# Altium PCB PCB1.PcbDoc
Units mm, origin at the board's own origin, x right, y up, seen from the top; angles counter-clockwise.
Board outline 152.4 x 101.6 mm, 2 copper layers (Top Layer, Bottom Layer); 11 components, 9 nets, 47 pads, 0 vias.
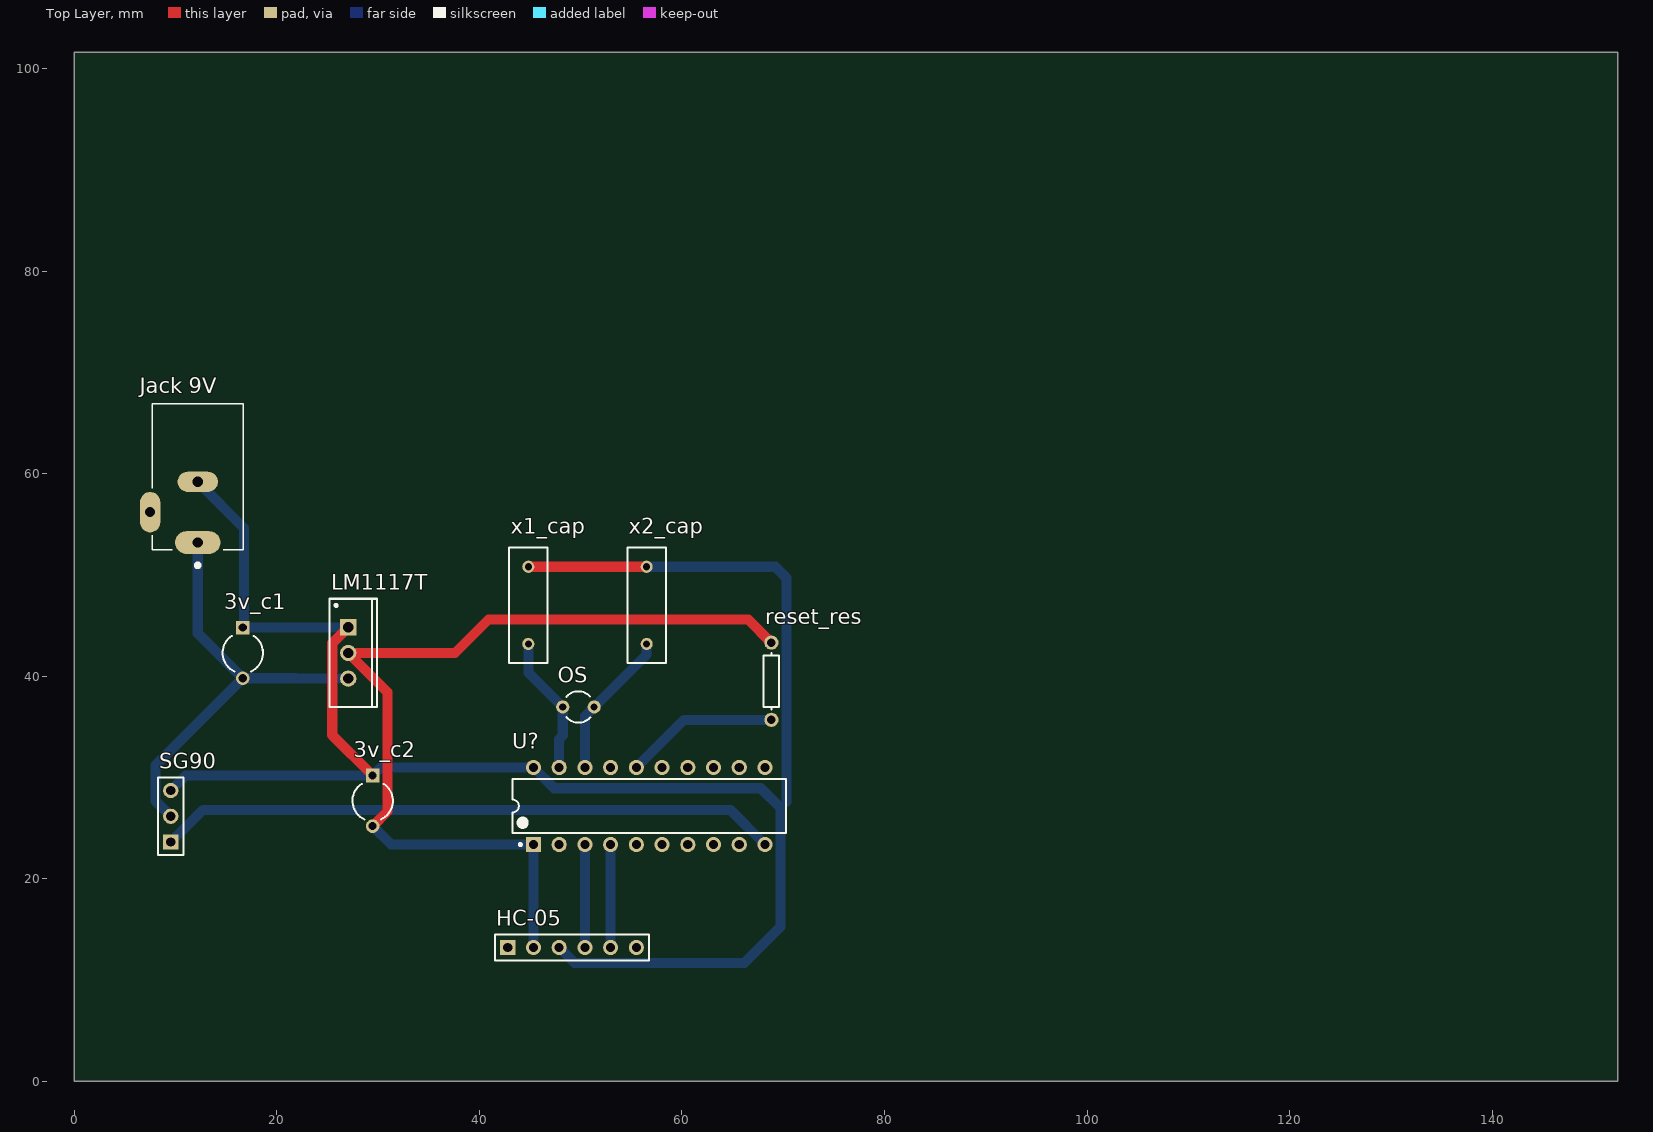
[diagram p0: Top Layer view]
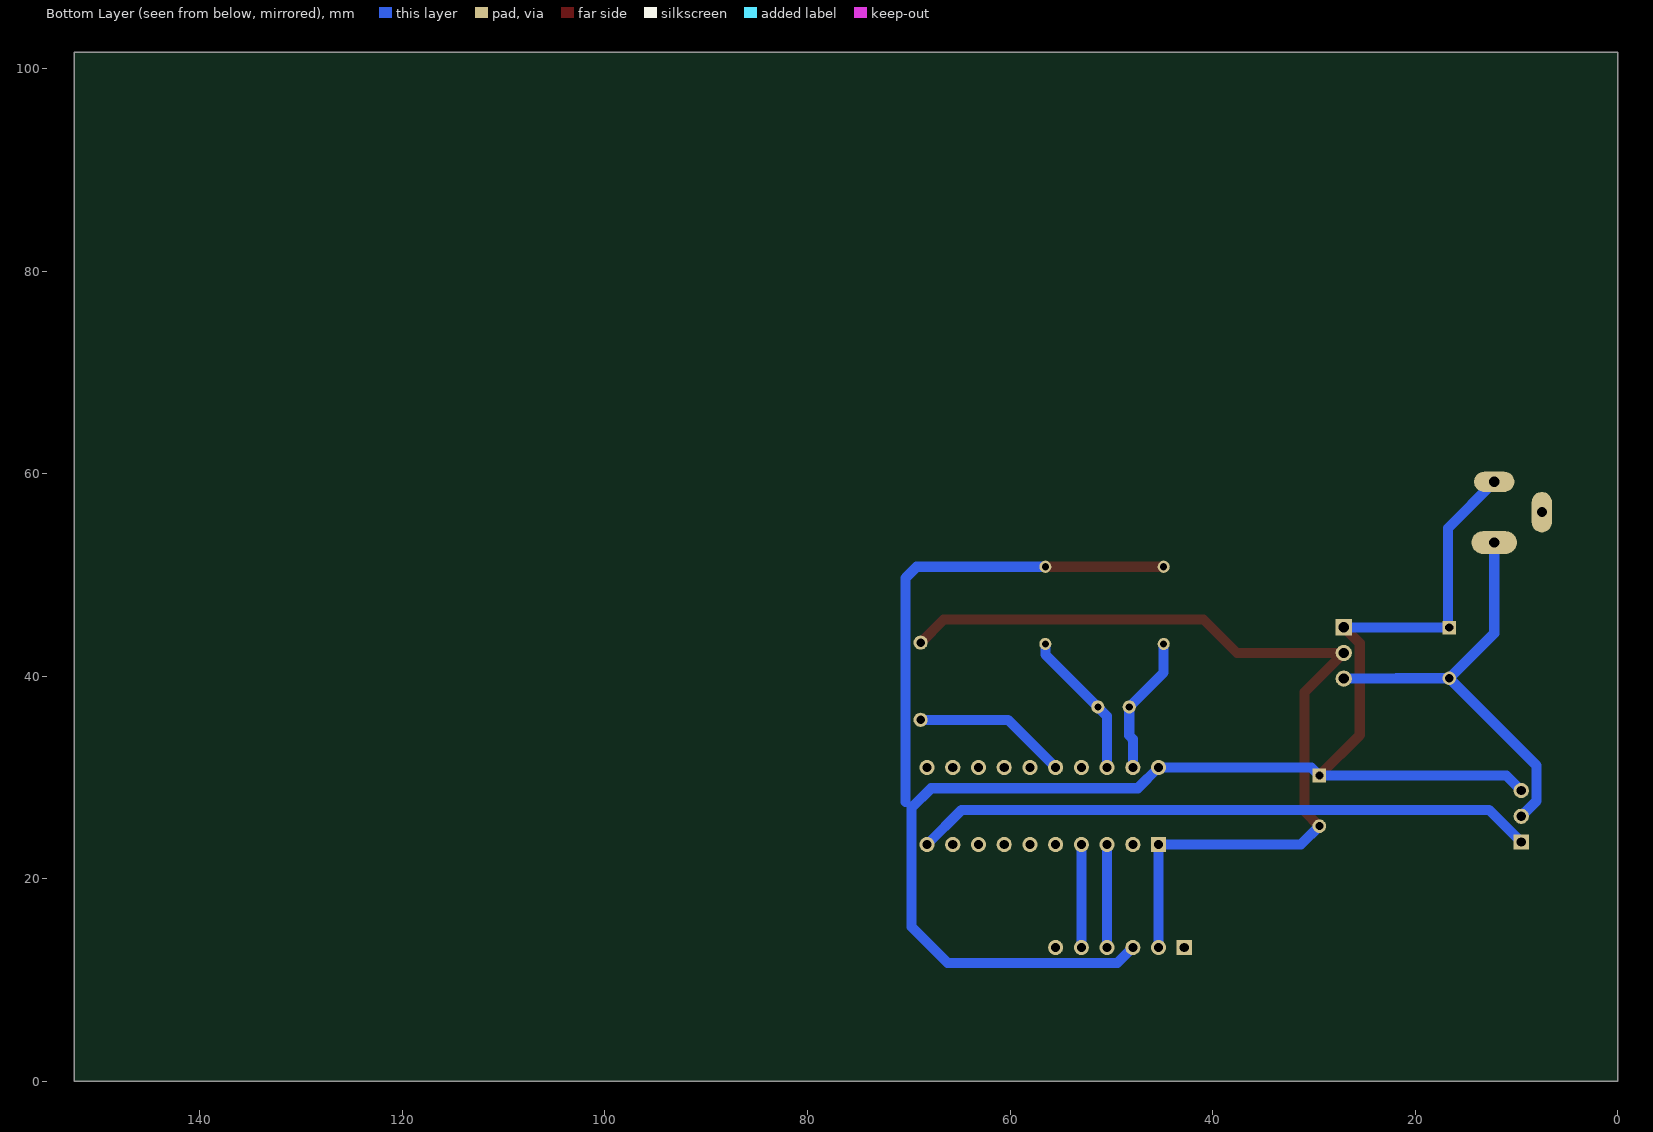
[diagram p1: Bottom Layer view, seen from below]

## Layer stack, top to bottom
Top Solder: solder mask 0.0102, Solder Resist, Dk 3.5
Top Layer: signal copper 0.0356
Dielectric 1: dielectric 0.32, FR-4, Dk 4.8
Bottom Layer: signal copper 0.0356
Bottom Solder: solder mask 0.0102, Solder Resist, Dk 3.5

## Board outline
0,0 152.4,0 152.4,101.6 0,101.6

## Design rules (kind name [scope] priority, off if disabled: settings)
Clearance [All] p1: gap=0.254
PolygonConnect [All] p1: connectstyle=Relief reliefconductorwidth=0.254 reliefentries=4 polygonreliefangle="90 Angle" airgapwidth=0.254
RoomDefinition Sheet1 [InComponentClass('Sheet1')] p1: confinementstyle=ConfineIn formatcopy=TRUE lockcomponents=FALSE outline 0,0 77.47,0 77.47,68.961 0,68.961
RoutingVias [All] p1: holewidth=0.711 width=1.27 viastyle="Through Hole" minholewidth=0.711 minwidth=1.27 maxholewidth=0.711 maxwidth=1.27
SolderMaskExpansion [All] p1: expansion=0.102
Width [All] p1: maxlimit=1 minlimit=1 preferedwidth=1 minimp=50.000000 maximp=50.000000 favimp=50.000000
30 further rules are at their usual default settings.

## Components (designator, comment, footprint, x,y, rotation, side; value= is the part's Value field where it differs from the comment)
3v_c1 "Cap2" CAPR5-4X5 16.637,42.291 r270 top
3v_c2 "Cap2" CAPR5-4X5 29.464,27.686 r270 top
HC-05 "Bluetooth Module" HDR1X6 42.799,13.208 r0 top
"Jack 9V" "PJ-002BH" CUI_PJ-002BH 12.192,59.69 r90 top
LM1117T "LM1117T-3.3" T03B 27.051,42.291 r270 top
OS "XTAL" R38 49.784,36.957 r270 top
reset_res "Res1" AXIAL-0.3 68.834,39.497 r270 top
SG90 "Servo" HDR1X3 9.525,23.622 r90 top
U? "MSP430G2533IN20" TI-N20 56.769,27.178 r90 top
x1_cap "x1_Cap" RAD-0.3 44.831,46.99 r90 top
x2_cap "x2_Cap" RAD-0.3 56.515,46.99 r90 top

## Footprints (in the part's own frame and the unit in brackets; to place one, negate y for a bottom-side part, rotate by r counter-clockwise, add the part's x,y. Pads: shape width x height; smd on the part's side, far side on the other; paste and mask are expansions set on the pad)
AXIAL-0.3 [mm] "Axial Device, Thru-Hole; 2 Leads; 0.3 in Pin Spacing"
  round 1.4 hole 0.85: 1(-3.81,0) 2(3.81,0)
  silkscreen extent -2.77,-0.76 2.77,0.76
CAPR5-4X5 [mm] "Capacitor; 2 Leads"
  rect 1.35x1.35 hole 0.8: 1(-2.5,0)
  round 1.35 hole 0.8: 2(2.5,0)
  silkscreen extent -1.69,-2 1.82,2
CUI_PJ-002BH [mm]
  oval 2.25x4.5 hole 1: 1(-6.5,0)
  oval 2x4 hole 1: 2(-0.5,0)
  oval 4x2 hole 1: 3(-3.5,4.7)
  silkscreen extent -8.94,-4.5 7.2,4.5
HDR1X3 [mm] "Connector; Header; 3 Position"
  rect 1.5x1.5 hole 0.9: 1(0,0)
  round 1.5 hole 0.9: 2(2.54,0) 3(5.08,0)
  silkscreen extent -1.27,-1.27 6.35,1.27
HDR1X6 [mm] "Connector; Header; 6 Position"
  rect 1.5x1.5 hole 0.9: 1(0,0)
  round 1.5 hole 0.9: 2(2.54,0) 3(5.08,0) 4(7.62,0) 5(10.16,0) 6(12.7,0)
  silkscreen extent -1.27,-1.27 13.97,1.27
R38 [mm] "Crystal, Thru-Hole; 2 Leads; Body 3.1 x 8.2 mm (Dia.xH)"
  round 1.3 hole 0.7: 1(0,1.55) 2(0,-1.55)
  silkscreen extent -1.55,-1.19 1.55,1.17
RAD-0.3 [mm] "Radial Cap, Thru-Hole; 2 Leads; 0.3 in Pin Spacing"
  round 1.2 hole 0.7: 1(-3.81,0) 2(3.81,0)
  silkscreen extent -5.71,-1.91 5.71,1.91
T03B [mm] "TO, Thru-Hole, Vertical, Heatsink Mounted; 3 In-Line Leads; Pitch 2.54 mm"
  rect 1.6x1.6 hole 1: 1(-2.54,0)
  round 1.6 hole 1: 2(0,0) 3(2.54,0)
  silkscreen extent -5.35,-1.85 5.35,2.85, body extent -5.4,-1.9 5.4,2.9, height 19.4
TI-N20 [mm] "DIP, 20-Leads, Body 25.4x6.35 mm, Pitch 2.54 mm"
  rect 1.5x1.5 hole 0.9: 1(-3.81,11.43)
  round 1.5 hole 0.9: 2(-3.81,8.89) 3(-3.81,6.35) 4(-3.81,3.81) 5(-3.81,1.27) 6(-3.81,-1.27) 7(-3.81,-3.81) 8(-3.81,-6.35) 9(-3.81,-8.89) 10(-3.81,-11.43) 11(3.81,-11.43) 12(3.81,-8.89) 13(3.81,-6.35) 14(3.81,-3.81) 15(3.81,-1.27) 16(3.81,1.27) 17(3.81,3.81) 18(3.81,6.35) 19(3.81,8.89) 20(3.81,11.43)
  silkscreen extent -3.93,-13.5 2.65,13.5, body extent -3.95,-13.45 3.95,13.45, height 5.08

## Part data
3v_c1 3v_c2: "Capacitor"
HC-05: library part "Header 6", "Header, 6-Pin"
"Jack 9V": "2.5 mm Center Pin, 5.0 A, Right Angle, Through Hole, Dc Power Jack Connector"
LM1117T: "800mA Low-Dropout Linear Regulator, 3-pin TO-220"
OS: "Crystal Oscillator"
reset_res: "Resistor"
SG90: library part "Header 3", "Header, 3-Pin"
U?: "16 MHz Mixed Signal Microcontroller with 16 KB Flash, 512 B SRAM and 24 GPIOs, -40 to 85 degC, 20-pin DIP (N), Pb-Free (RoHS)"
x1_cap x2_cap: library part Cap, "Capacitor"

## Nets (pads, with @x,y where several pads share a name; then routed paths per layer and width w, separated by ;. In a path a pad name is that pad's centre, name@x,y a point inside that pad or via, vN(x,y) a via of type N, cw(c..) or ccw(c..) an arc to the next point about the centre after c; other vN are vias at no path point)
GND: 3v_c1.1 3v_c2.1 "Jack 9V.2" HC-05.3 LM1117T.1 SG90.3 U?.20 x1_cap.2 x2_cap.2 | length 190.1
  Top Layer w1: LM1117T.1 25.476,43.256 25.476,34.174 3v_c2.1 ; x1_cap.2 x2_cap.2
  Bottom Layer w1: SG90.3 11.009,30.186 3v_c2.1 30.266,30.988 U?.20 47.396,28.931 67.793,28.931 69.723,27 69.723,15.24 66.167,11.684 49.403,11.684 HC-05.3 ; 12.192,59.19 16.764,54.618 3v_c1.1@16.764,44.918 ; 3v_c1.1 27.011,44.791 LM1117T.1 ; x2_cap.2 69.215,50.8 70.307,49.708 70.307,27.584
Net3v_c1_2: 3v_c1.2 "Jack 9V.1" LM1117T.3 SG90.2 | length 43.5
  Bottom Layer w1: SG90.2 8.001,27.686 8.001,31.155 3v_c1.2 ; 12.192,53.19 12.192,44.236 3v_c1.2 ; LM1117T.3 21.859,39.751 21.819,39.791 3v_c1.2
Net3v_c2_2: 3v_c2.2 HC-05.2 LM1117T.2 reset_res.1 U?.1 | length 90.2
  Top Layer w1: 3v_c2.2 30.912,26.634 30.912,38.43 LM1117T.2 37.592,42.291 40.894,45.593 66.548,45.593 reset_res.1
  Bottom Layer w1: 3v_c2.2 31.282,23.368 U?.1 HC-05.2
NetHC-05_4: HC-05.4 U?.3 | length 10.2
  Bottom Layer w1: HC-05.4 U?.3
NetHC-05_5: HC-05.5 U?.4 | length 10.2
  Bottom Layer w1: HC-05.5 U?.4
NetOS_1: OS.1 U?.18 x2_cap.1 | length 14.7
  Bottom Layer w1: U?.18 50.419,36.042 OS.1 56.515,42.138 x2_cap.1
NetOS_2: OS.2 U?.19 x1_cap.1 | length 13.7
  Bottom Layer w1: x1_cap.1 44.831,40.36 OS.2 48.234,34.137 47.879,33.782 U?.19
Netreset_res_2: reset_res.2 U?.16 | length 15.3
  Bottom Layer w1: U?.16 60.198,35.687 reset_res.2
NetSG90_1: SG90.1 U?.10 | length 61.4
  Bottom Layer w1: SG90.1 12.7,26.797 64.77,26.797 U?.10
pads on no net: "Jack 9V.3" HC-05.1 HC-05.6 U?.2 U?.5 U?.6 U?.7 U?.8 U?.9 U?.11 U?.12 U?.13 U?.14 U?.15 U?.17